# Altium PCB PCB1.PcbDoc
Units mil, origin at the board's own origin, x right, y up, seen from the top; angles counter-clockwise.
Board outline 1245 x 925 mil, 2 copper layers (Top Layer, Bottom Layer); 18 components, 10 nets, 43 pads, 45 vias.
Unrouted connection lines stored in the file: 28.
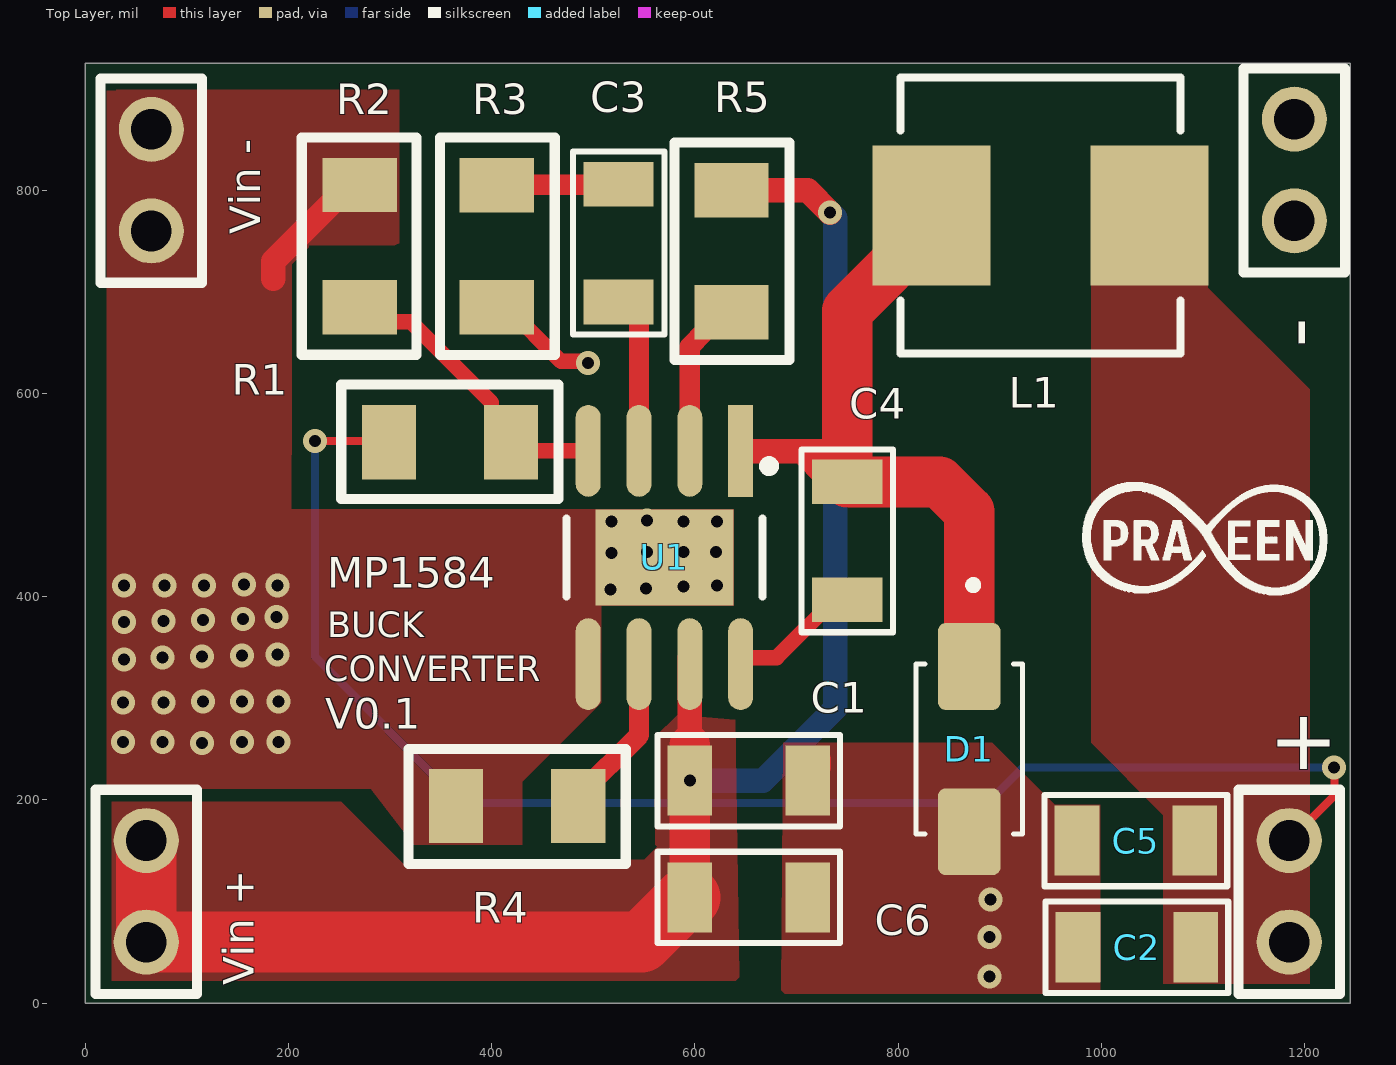
[diagram p0: Top Layer view]
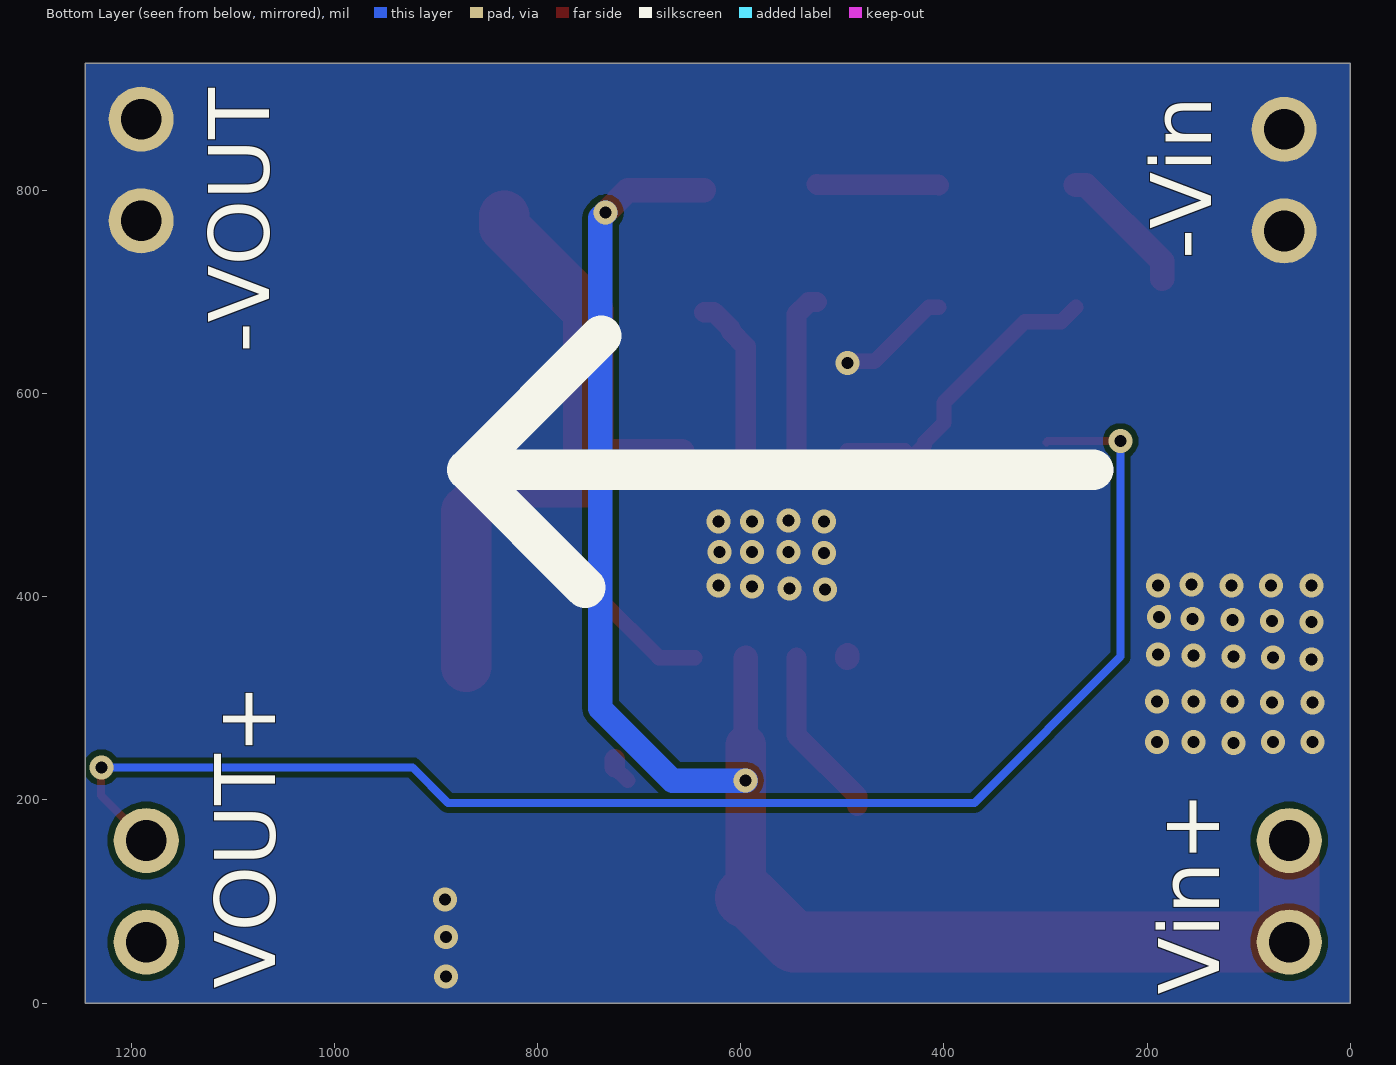
[diagram p1: Bottom Layer view, seen from below]
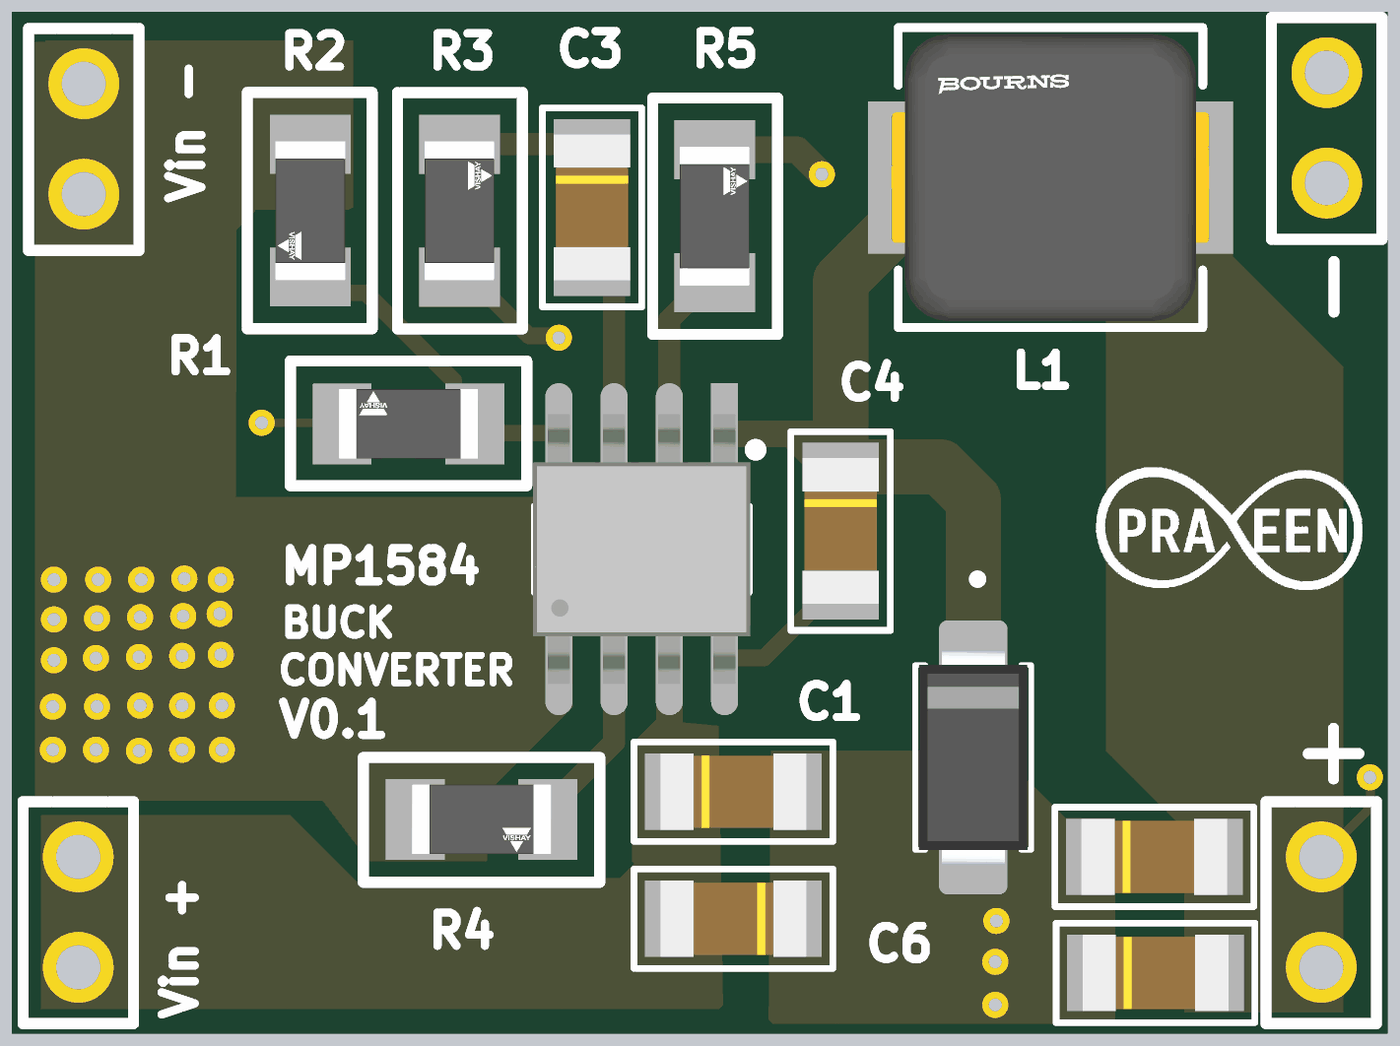
[diagram p2: 3D render of the assembled board from above, using the file's embedded part models]

## Layer stack, top to bottom
Top Solder: solder mask 0.4, Solder Resist, Dk 3.5
Top Layer: signal copper 1.4
Dielectric 1: dielectric 12.6, FR-4, Dk 4.8
Bottom Layer: signal copper 1.4
Bottom Solder: solder mask 0.4, Solder Resist, Dk 3.5

## Board outline
0,0 1245,0 1245,925 0,925

## Design rules (kind name [scope] priority, off if disabled: settings)
Clearance [All] p1: gap=6 ignorepadtopadclearanceinfootprint=TRUE
HoleToHoleClearance [All] p1: gap=6 allowstackedmicrovias=TRUE
MinimumSolderMaskSliver [All] p1: minsoldermaskwidth=6
PolygonConnect [All] p1: connectstyle=Direct reliefconductorwidth=10 reliefentries=4 polygonreliefangle="90 Angle" airgapwidth=10
RoutingVias [All] p1: holewidth=11.81 width=23.62 viastyle="Through Hole" minholewidth=11.81 minwidth=15.75 maxholewidth=393.7 maxwidth=393.7
SilkToSilkClearance [All] p1: silktosilkclearance=6
SilkToSolderMaskClearance [IsPad] p1: minsilkscreentomaskgap=6 clearancetoexposedcopper=TRUE
SolderMaskExpansion [All] p1: expansion=0 istentingtop=FALSE
SupplyNets "Schematic Supply Nets_2" [InNet('VOUT')] p1: voltage=0.000
SupplyNets "Schematic Supply Nets_1" [InNet('GND')] p2: voltage=0.000
SupplyNets "Schematic Supply Nets" [InNet('V IN')] p3: voltage=0.000
Width [All] p1: maxlimit=100 minlimit=6 preferedwidth=8
26 further rules are at their usual default settings.

## Classes and differential pairs
component class Sheet1: - C1 C2 C3 C4 C5 C6 L1 R1 R2 R3 R4 U1

## Components (designator, comment, footprint, x,y, rotation, side; value= is the part's Value field where it differs from the comment)
+ "CONN 1 x 2 2.54 MM" HDR_1X2_2.54MM 1185,160 r0 top (schematic designator J1)
- "CONN 1 x 2 2.54 MM" HDR_1X2_2.54MM 1190,870 r0 top (schematic designator J3)
C1 "22uF, 25V" CAP_CC1206_3P2X1P6_YAG 653,219 r0 top value=22µF
C2 "22uF, 25V" CAP_CC1206_3P2X1P6_YAG 1035,55 r0 top value=22µF
C3 "22uF, 25V" CAP_CC1206_3P2X1P6_YAG 525,748 r270 top value=22µF
C4 "22uF, 25V" CAP_CC1206_3P2X1P6_YAG 750,455 r270 top value=22µF
C5 "0.1uF, 50V" CAP_CC1206_3P2X1P6_YAG 1034,160 r0 top value=22µF
C6 "0.1uF, 50V" CAP_CC1206_3P2X1P6_YAG 653,104 r180 top value=22µF
D1 "Diode" DIOM4226X229N 870,250 r270 top
L1 "10uH" FP-SRP7050TA-MFG 940,775 r0 top value=10µH
R1 "210K" FP-CRCW1206-E3-IPC_A 358.92,552 r180 top
R2 "40.2K" FP-CRCW1206-E3-IPC_A 270,745.08 r270 top
R3 "100K" FP-CRCW1206-E3-IPC_A 405,745 r90 top
R4 "100K" FP-CRCW1206-E3-IPC_A 425,194 r0 top
R5 "100K" FP-CRCW1206-E3-IPC_A 636,740 r90 top
U1 "MP1584" FP-MP1584EN-LF-Z-IPC_A 570,438.58 r270 top
"Vin +" "CONN 1 x 2 2.54 MM" HDR_1X2_2.54MM 60,160 r0 top (schematic designator J2)
"Vin -" "CONN 1 x 2 2.54 MM" HDR_1X2_2.54MM 65,860 r0 top (schematic designator J4)

## Footprints (in the part's own frame and the unit in brackets; to place one, negate y for a bottom-side part, rotate by r counter-clockwise, add the part's x,y. Pads: shape width x height; smd on the part's side, far side on the other; paste and mask are expansions set on the pad)
CAP_CC1206_3P2X1P6_YAG [mil]
  rect 44x69 smd paste+0 mask+0: 1(-58,0) 2(58,0)
  silkscreen extent -90,-45 90,45, body extent -66,-34 66,34, height 49
DIOM4226X229N [mm]
  rrect25% 2.17x1.57 smd: A(2.065,0) B(-2.065,0)
  silkscreen extent -4.2,-1.33 2.12,1.33, body extent -2.47,-1.25 2.47,1.25, height 2.2
FP-CRCW1206-E3-IPC_A [mil]
  rect 53.39x73.16 smd paste+0 mask+0: 1(-60.08,0) 2(60.08,0)
  silkscreen extent -107,-57 107,56, body extent -106,-56 106,56, height 10
FP-MP1584EN-LF-Z-IPC_A [mil]
  rect 90.48x24.54 smd paste+0 mask+0: 1(-105,75)
  rrect100% 90.48x24.54 smd paste+0 mask+0: 2(-105,25) 3(-105,-25) 4(-105,-75) 5(105,-75) 6(105,-25) 7(105,25) 8(105,75)
  rect 94.88x135.83 smd paste-39370.1 mask+0: 9(0,0)
  silkscreen extent -95,-96 39,108, body extent -164,-116 164,116, height 10
FP-SRP7050TA-MFG [mm]
  rect 2.95x3.5 smd paste+0 mask+0: 1(-2.725,0) 2(2.725,0)
  silkscreen extent -3.5,-3.45 3.5,3.45, body extent -4.3,-3.55 4.3,3.55, height 0.25
HDR_1X2_2.54MM [mil]
  round 64 hole 40: 1(0,0) 2(0,-100)
  silkscreen extent -50,-151 50,50

## Part data
+ - "Vin +" "Vin -": library part "CONN 2 X 2.54"
C1 C2 C3 C4 C5 C6: library part CC1206KKX5R8BB226, "CAP CER 22UF 25V X5R 1206", Case Code (Imperial)=1206, Case Code (Metric)=3216, Dielectric=X5R, Dielectric Material=Ceramic, Manufacturer="Yageo Group", Max Operating Temperature=85°C, Min Operating Temperature=-55°C, Supplier Part Number=13-CC1206KKX5R8BB226DKR-ND, Tolerance=10%, Voltage Rating=25V, Case/Package=1206, Category="Ceramic Capacitors", China RoHS=Compliant, ComponentLink1Description=https://datasheet.octopart.com:443/CC1206KKX5R8BB226-Yageo-datasheet-170350636.pdf?src-supplier=IHS, ComponentLink1URL=https://datasheet.octopart.com:443/CC1206KKX5R8BB226-Yageo-datasheet-170350636.pdf?src-supplier=IHS, ComponentLink2Description=https://datasheet.octopart.com:443/CC1206KKX5R8BB226-Yageo-Group-datasheet-189192896.pdf?src-supplier=TME, ComponentLink2URL=https://datasheet.octopart.com:443/CC1206KKX5R8BB226-Yageo-Group-datasheet-189192896.pdf?src-supplier=TME, ComponentLink3Description=https://datasheet.octopart.com:443/CC1206KKX5R8BB226-Yageo-datasheet-181970653.pdf?src-supplier=Farnell, ComponentLink3URL=https://datasheet.octopart.com:443/CC1206KKX5R8BB226-Yageo-datasheet-181970653.pdf?src-supplier=Farnell, ComponentLink4Description=https://datasheet.octopart.com:443/CC1206KKX5R8BB226-Yageo-datasheet-181970650.pdf?src-supplier=Farnell, ComponentLink4URL=https://datasheet.octopart.com:443/CC1206KKX5R8BB226-Yageo-datasheet-181970650.pdf?src-supplier=Farnell, ComponentLink5Description=https://datasheet.octopart.com:443/CC1206KKX5R8BB226-Yageo-datasheet-158238148.pdf?src-supplier=Newark, ComponentLink5URL=https://datasheet.octopart.com:443/CC1206KKX5R8BB226-Yageo-datasheet-158238148.pdf?src-supplier=Newark, ComponentLink6Description=https://datasheet.octopart.com:443/CC1206KKX5R8BB226-Yageo-Group-datasheet-145016144.pdf?src-supplier=ODG+(Origin+Data+Global), ComponentLink6URL=https://datasheet.octopart.com:443/CC1206KKX5R8BB226-Yageo-Group-datasheet-145016144.pdf?src-supplier=ODG+(Origin+Data+Global), ComponentLink7Description=https://datasheet.octopart.com:443/CC1206KKX5R8BB226-Yageo-datasheet-137700085.pdf?src-supplier=Future+Electronics, ComponentLink7URL=https://datasheet.octopart.com:443/CC1206KKX5R8BB226-Yageo-datasheet-137700085.pdf?src-supplier=Future+Electronics, ComponentLink8Description=https://datasheet.octopart.com:443/CC1206KKX5R8BB226-Yageo-datasheet-78855687.pdf?src-supplier=Future+Electronics, ComponentLink8URL=https://datasheet.octopart.com:443/CC1206KKX5R8BB226-Yageo-datasheet-78855687.pdf?src-supplier=Future+Electronics, ComponentLink9Description=https://datasheet.octopart.com:443/CC1206KKX5R8BB226-Yageo-datasheet-62067349.pdf?src-supplier=Future+Electronics, ComponentLink9URL=https://datasheet.octopart.com:443/CC1206KKX5R8BB226-Yageo-datasheet-62067349.pdf?src-supplier=Future+Electronics, ComponentLink10Description=https://datasheet.octopart.com:443/CC1206KKX5R8BB226-Yageo-datasheet-68071816.pdf?src-supplier=Future+Electronics, ComponentLink10URL=https://datasheet.octopart.com:443/CC1206KKX5R8BB226-Yageo-datasheet-68071816.pdf?src-supplier=Future+Electronics, ComponentLink11Description=https://datasheet.octopart.com:443/CC1206KKX5R8BB226-Yageo-datasheet-68297942.pdf?src-supplier=Future+Electronics, ComponentLink11URL=https://datasheet.octopart.com:443/CC1206KKX5R8BB226-Yageo-datasheet-68297942.pdf?src-supplier=Future+Electronics, ComponentLink12Description=https://datasheet.octopart.com:443/CC1206KKX5R8BB226-Yageo-Group-datasheet-192360830.pdf?src-supplier=Future+Electronics, ComponentLink12URL=https://datasheet.octopart.com:443/CC1206KKX5R8BB226-Yageo-Group-datasheet-192360830.pdf?src-supplier=Future+Electronics, ComponentLink13Description=https://datasheet.octopart.com/CC1206KKX5R8BB226-Yageo-datasheet-86397281.pdf, ComponentLink13URL=https://datasheet.octopart.com/CC1206KKX5R8BB226-Yageo-datasheet-86397281.pdf, ComponentLink14Description=http://sigma.octopart.com:80/conflict_mineral_statement/Yageo-company-3.pdf?src-supplier=Compliance+Statements, ComponentLink14URL=http://sigma.octopart.com:80/conflict_mineral_statement/Yageo-company-3.pdf?src-supplier=Compliance+Statements, ComponentLink15Description=http://sigma.octopart.com:80/rohs_statement/Yageo-company-2.pdf?src-supplier=Compliance+Statements, ComponentLink15URL=http://sigma.octopart.com:80/rohs_statement/Yageo-company-2.pdf?src-supplier=Compliance+Statements, Composition=Ceramic, Country of Origin="Mainland China, Taiwan", Export Control Classification Number (ECCN) Code=EAR99, Halogen Free="Halogen Free", Harmonized Tariff Schedule (HTS) Code=8532.24.00.20, Height=1.6mm, Introduction Date=2014-07-08, Lead Free="Lead Free", Length=3.2mm, Lifecycle Status=Production, Manufacturer Part Number=CC1206KKX5R8BB226, Mounting Technology="Surface Mount", Number of Terminals=2, Packaging="Tape & Reel (TR)", Pricing="1=0.65, 10=0.406, 50=0.3078, 100=0.2777, 500=0.22678, 1000=0.21106 (USD)", REACH SVHC=Yes, RoHS=Compliant, Schedule B="8532240020, 8532240020|8532240020|8532240020|8532240020|8532240020", Supplier=DigiKey, Termination=SMD/SMT, Thickness=1.4478mm, Voltage Rating (DC)=25V, Weight=16.187578mg, Width=1.6mm
D1: library part SS34-HF, "Diode Schottky 40v 3A SMD DO-214AC(SMA)"
L1: library part SRP7050TA-100M, "Inductor Power Shielded Wirewound 10uH 20% 100KHz 15Q-Factor Carbonyl Powder 4A 0.069Ohm DCR Automotive T/R", Case/Package=Nonstandard, Current Rating=4A, DC Resistance (DCR)=69mΩ, Inductance Tolerance=20%, Manufacturer=Bourns, Max Operating Temperature=150°C, Min Operating Temperature=-55°C, Ratings=AEC-Q200, Saturation Current=7.5A, Self Resonant Frequency=15MHz, Test Frequency=100kHz, Category="Fixed Inductors", China RoHS=Compliant, ComponentLink1Description=https://datasheet.octopart.com:443/SRP7050TA-100M-Bourns-datasheet-156155934.pdf?src-supplier=IHS, ComponentLink1URL=https://datasheet.octopart.com:443/SRP7050TA-100M-Bourns-datasheet-156155934.pdf?src-supplier=IHS, ComponentLink2Description=https://datasheet.octopart.com:443/SRP7050TA-100M-Bourns-datasheet-68307002.pdf?src-supplier=Master+Electronics, ComponentLink2URL=https://datasheet.octopart.com:443/SRP7050TA-100M-Bourns-datasheet-68307002.pdf?src-supplier=Master+Electronics, ComponentLink3Description=https://datasheet.octopart.com:443/SRP7050TA-100M-Bourns-datasheet-99355716.pdf?src-supplier=Farnell, ComponentLink3URL=https://datasheet.octopart.com:443/SRP7050TA-100M-Bourns-datasheet-99355716.pdf?src-supplier=Farnell, ComponentLink4Description=https://datasheet.octopart.com:443/SRP7050TA-100M-Bourns-datasheet-46733423.pdf?src-supplier=element14+APAC, ComponentLink4URL=https://datasheet.octopart.com:443/SRP7050TA-100M-Bourns-datasheet-46733423.pdf?src-supplier=element14+APAC, ComponentLink5Description=http://sigma.octopart.com:80/conflict_mineral_statement/Bourns-company-36.pdf?src-supplier=Compliance+Statements, ComponentLink5URL=http://sigma.octopart.com:80/conflict_mineral_statement/Bourns-company-36.pdf?src-supplier=Compliance+Statements, Composition=Wirewound, Core Material="Carbonyl Powder", Export Control Classification Number (ECCN) Code=EAR99, Harmonized Tariff Schedule (HTS) Code=8504.50.80.00, Height=4.8mm, Height - Seated (Max)=5.0038mm, Introduction Date=2015-08-06, Length=7.3mm, Lifecycle Status=Production, Manufacturer Part Number=SRP7050TA-100M, Max Current Rating=4A, Mounting Technology="Surface Mount", Number of Circuits=1, Number of Terminals=2, Pricing="800=0.5393 (USD)", Q Factor=15, REACH SVHC=Yes, RMS Current (Irms)=4A, RoHS=Compliant, Schedule B="8504500000, 8504500000|8504500000, 8504500000|8504500000|8504500000, 8504500000|8504500000|8504500000|8504500000", Shielding=Shielded, Stock=3200, Supplier="Arrow Electronics", Supplier Part Number=SRP7050TA-100M, Tolerance=20%, Width=6.6mm
R1 R2 R3 R4 R5: library part Resistor_1206
U1: "Buck Switching Regulator IC Positive Adjustable 0.8V 1 Output 3A 8-SOIC (0.154\", 3.90mm Width) Exposed Pad"

## Via types
v1: diameter 23.62, hole 11.81, Top Layer to Bottom Layer, 45 vias

## Nets (pads, with @x,y where several pads share a name; then routed paths per layer and width w, separated by ;. In a path a pad name is that pad's centre, name@x,y a point inside that pad or via, vN(x,y) a via of type N, cw(c..) or ccw(c..) an arc to the next point about the centre after c; other vN are vias at no path point)
en: R5.1 U1.2 | length 165.5
  Top Layer w20: U1.2@595,537.17 595,646.22 609.42,660.64 609.42,663.22 626.11,679.92 R5.1
GND: "Vin -.1" "Vin -.2" -.1 -.2 C1.2 C2.1 C5.1 C6.1 D1.A R2.1 R3.1 R4.1 U1.5 U1.9 | length 274.7
  Top Layer w15: R3.1 414.89,684.92 468.15,631.65 493.35,631.65 v1(495,630) ; C1.2 C1.2@724,232
  Top Layer w20: C1.2@724,232 C1.2@724,240.02
  Top Layer w24: 185,713 185,730.05 260.11,805.16 R2.1 ; U1.5@494.75,342.27 495,342.02 U1.5@495,340
  other v1: 890,26 890,65 891,102 115,256 37,257 76,257 154,257 190,257 37,296 77,296 116,297 154,297 190,297 38,338 76,340 115,341 154,342 189,343 38,375 77,376 116,377 155,378 188,380 517,407 552,408 589,410 38,411 78,411 117,411 189,411 622,411 156,412 518,443 553,444 589,444 621,444 518,474 589,474 622,474 553,475
inductor: C4.1 D1.B L1.1 U1.1 | length 685.5
  Top Layer w24: 657.33,543 727,543 ; 710.83,537.17 725,523 C4.1@740,523
  Top Layer w50: L1.1 832.72,764.17 750,681.46 750,543 750,523 C4.1 840.71,513 870,483.71 D1.B
NetC3_1: C3.1 R3.2 | length 120.4
  Top Layer w20: R3.2 405.46,805.54 524.54,805.54 C3.1
NetC3_2: C3.2 U1.3 | length 165.8
  Top Layer w20: C3.2 533,690 545,678 U1.3@545,537.17
NetC4_2: C4.2 U1.8 | length 128.6
  Top Layer w15: U1.8@645,340 680.5,340 737.5,397 C4.2
NetR1_1: R1.1 R2.2 U1.4 | length 313.3
  Top Layer w15: R2.2 284.29,670.71 320.29,670.71 399.81,591.19 399.81,571.19 R1.1 ; R1.1@419,549.19 438.19,530 438.19,543.58 U1.4
NetR4_2: R4.2 U1.6 | length 170.8
  Top Layer w20: R4.2 485.08,203.89 545,263.8 U1.6@545,340
"V IN": "Vin +.1" "Vin +.2" C1.1 C6.2 R5.2 U1.7 | length 1657.9
  Top Layer w24: 595,254 U1.7@595,340 ; R5.2 710.92,800.08 v1(733,778)
  Top Layer w40: C6.2 v1(595,219) 595,254
  Top Layer w60: 60,160 60,60 547.5,60 591.5,104 C6.2
  Bottom Layer w24: v1(595,219) 667,219 738,290 738,773 v1(733,778)
VOUT: +.1 +.2 C2.2 C5.2 L1.2 R1.2 | length 1452.9
  Top Layer w7.87: v1(226,553) 297.84,553 R1.2 ; +.1 1229.44,204.44 1229.44,231.56 v1(1229,232)
  Bottom Layer w7.87: v1(226,553) 226,341 369.94,197.06 887.86,197.06 922.79,232 v1(1229,232)

## Polygon pours and split planes (outlines as drawn)
GND on Top Layer "GND_L01_P008" (solid, pour order 8): 29,899 309,899 309,748 310,747 309,746 220,746 220,744 203,727 203,615 203,592.17 202.55,486 638,486 638,391 507.62,391 507.62,295.38 430,217.76 430,156 323.12,156 281.07,210.98 21,210.98 21,898 30,898
VOUT on Top Layer "VOUT_L01_P004" (solid, pour order 4): 1205,19 1205,604 1105,704 1105,842 990,842 990,256 1061,185 1061,19
"V IN" on Top Layer "V_IN_L01_P007" (solid, pour order 7): 26,198 252,198 314,136 319,141 550,141 563,154 561,156 561,262 583,284 639.71,278.68 643.68,22 26,22 26,197
GND on Top Layer "GND_L01_P005" (solid, pour order 5): 686.83,256.17 684.8,9 999.25,9 998.78,9.38 998.78,195 954,195 892.83,256.17
GND on Bottom Layer "GND_L02_P012" (solid, pour order 12): 0,925 1245,925 1245,0 0,0

## Silkscreen, mask and mechanical layers (free items; w line width, h text height)
Top Overlay:
  drawing of 6 lines, arcs and shapes, not listed
  text "MP1584" at 238,409 h30
  text "BUCK" at 238,360 h25
  text "CONVERTER" at 235,317 h25
  text "V0.1" at 236,270 h30
Bottom Overlay:
  lines w40: 253,525 869,525 ; 753,409 869,525 ; 869,525 737,657 869,525
  text "-Vin" at 137,732 h60 r270
  text "-VOUT" at 1064,640 h60 r270
  text "VOUT+" at 1058,14 h60 r270
  text "Vin+" at 129,8 h60 r270
Mechanical 1:
  lines w0.1: 0,0 1245,0 1245,925